# EAGLE board hpwr_LO_psupp (EAGLE 6.6.0)
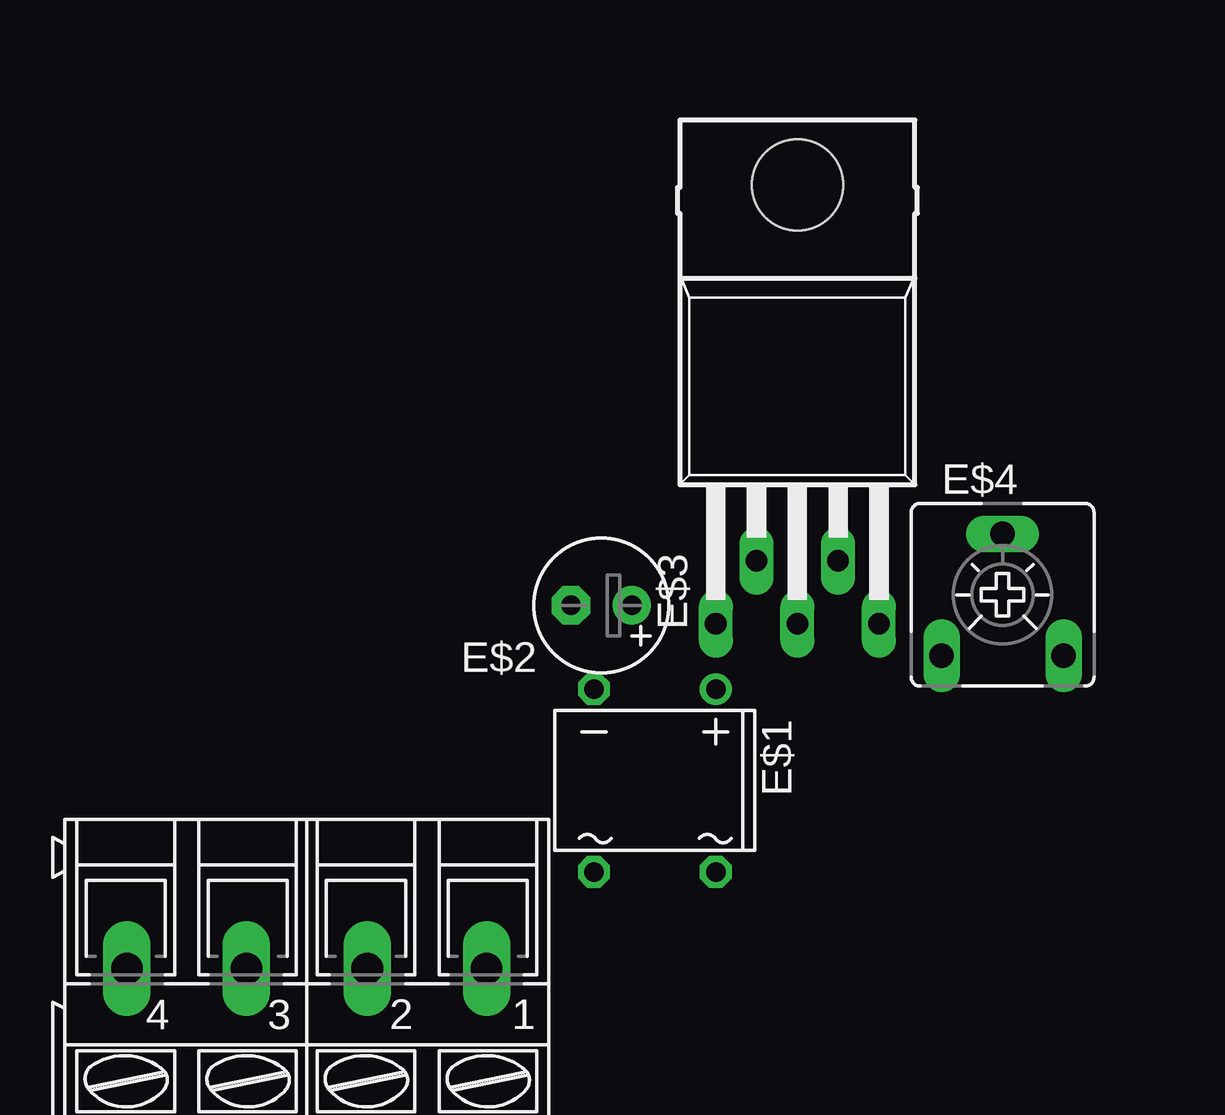
[diagram p0: board, top side]
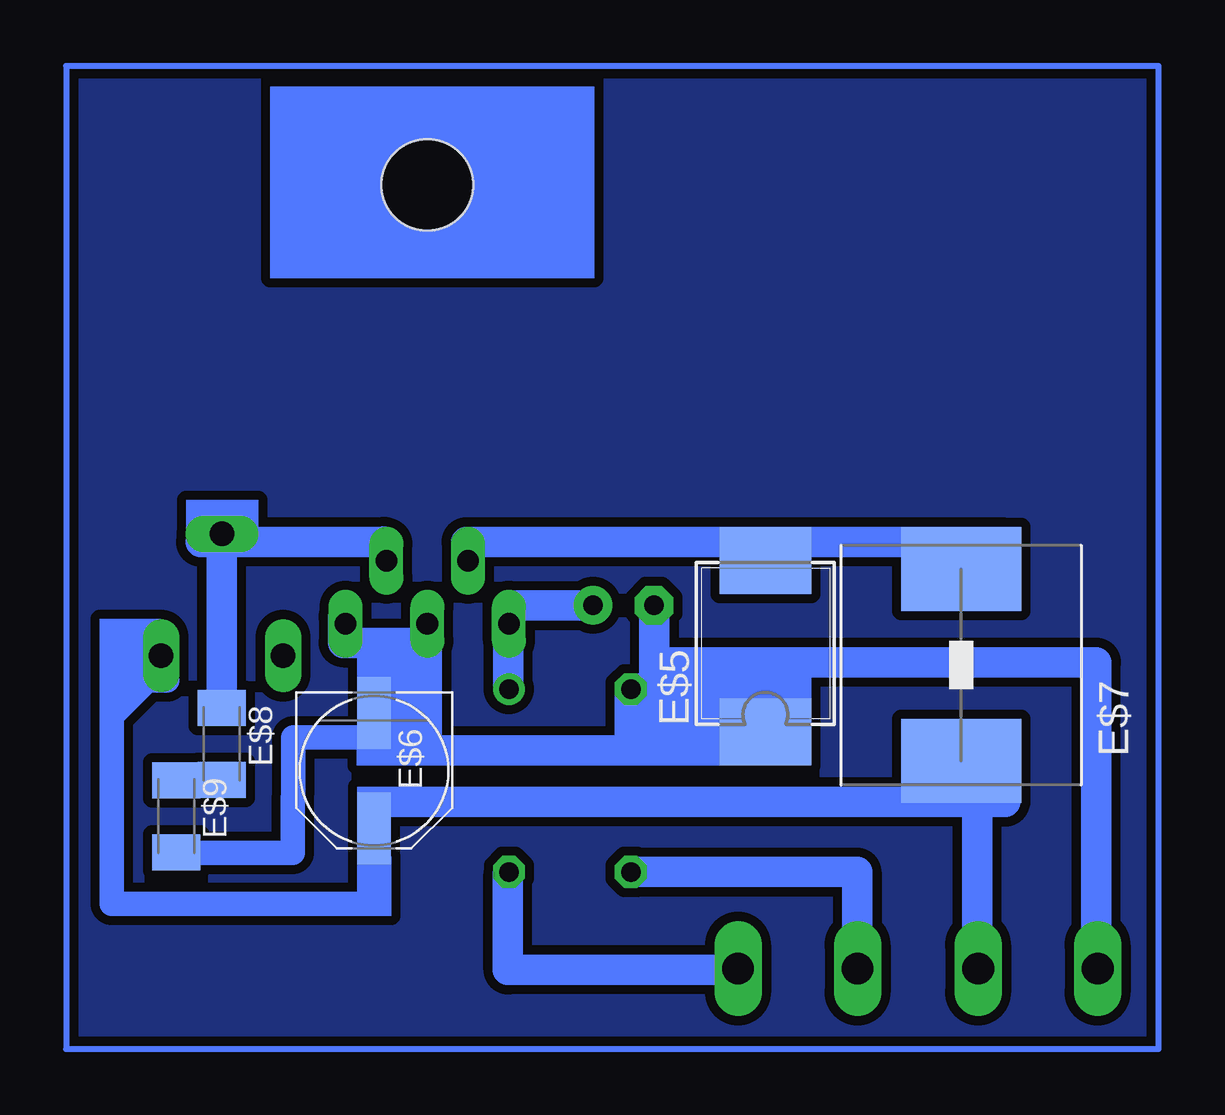
[diagram p1: board, bottom side, seen from below]

No outline drawn. Coordinates in mm, seen from the top.
Copper layers (1*16): Top 0.035mm / dielectric 1.5mm / Bottom 0.035mm
Design rules "default *": minimum track width 10mil, minimum drill 24mil, track to track 15mil, track to pad 15mil, pad to pad 15mil, via to via 15mil, smd to smd 15mil, copper to edge 40mil, drill to drill 8mil, minimum pad ring 10mil, minimum via ring 8mil, stop-mask expansion 4mil, vias tented up to drill 0mil, thermal gap 10mil

## Footprints (pad centres in the part's own frame; a part is rotated, then mirrored left to right if it is on the bottom)
DB = drill 0.813: + -2.54,-3.81 | drill 0.813 octagon: - 2.54,-3.81; AC1 2.54,3.81; AC2 -2.54,3.81
E2,5-6 = drill 0.813 pad 1.6: + -1.27,0 | drill 0.813 pad 1.6 octagon: - 1.27,0
TO220-52 = drill 0.9 long: 1 -3.4,-21.1; 2 -1.7,-18.47; 3 0,-21.1; 4 1.7,-18.47; 5 3.4,-21.1 | hole 3.8: 0,-2.8
CA6V = drill 1.016 long: A -2.54,-2.54; E 2.54,-2.54; S 0,2.54
SMC = smd 2.794 x 3.81: 1 -3.81,-0.127; 2 3.327,-0.127
PANASONIC_D = smd 3 x 1.4: + 2.4,0; - -2.4,0
WE-HC_74432... = smd 3.5 x 5: 1 -4,0; 2 4,0
C1206K = smd 1.5 x 2: 1 -1.5,0; 2 1.5,0
AK300/4 = drill 1.321 long: 1 -7.493,0; 2 -2.515,0; 3 2.515,0; 4 7.493,0

## Placement (x,y rotation side)
E$1  [DB]  24.53,11.19 180 top
E$2  [E2,5-6]  22.3,18.49 180 top
E$3  [TO220-52]  30.47,38.82 0 top
E$4  [CA6V]  39.02,18.93 0 top
E$5  [SMC]  16.51,17.03 90 bottom
E$6  [PANASONIC_D]  32.69,11.6 270 bottom
E$7  [WE-HC_74432...]  8.23,16 90 bottom
E$8  [C1206K]  39.03,12.71 270 bottom
E$9  [C1206K]  40.94,9.7 270 bottom
E$10  [AK300/4]  10.03,3.35 180 top

## Library data of the parts
E$1 = rectifier
E$2 E$6 E$8 E$9 = rcl
E$3 = ref-packages
E$4 = pot
E$5 = ref-packages-longpad
E$7 = wuerth-elektronik
E$10 = con-ptr500

## Tracks (layer width: path | path; a pad name or v marks a point on that pad's centre or on a via)
S$1
  Bottom 1.27: 27.09,15 27.09,18.49 23.4,18.49
S$2
  Bottom 1.27: 21.02,18.49 21.02,15.02 22.01,15.02
S$3
  Bottom 1.27: 6.37,21.12 28.85,21.14
S$4
  Bottom 1.27: 21.02,15.3 21.02,13.99 17.09,13.99
S$5
  Bottom 1.27: 30.5,17.76 30.5,16.93 | 30.5,16.93 30.5,12.45 17.62,12.45 | 33.98,18.01 33.98,16.93 30.5,16.93
S$6
  Bottom 1.27: 6.38,10.29 32.76,10.3
S$7
  Bottom 1.27: 32.28,21.16 32.28,21.13 39.04,21.13 | 39.04,21.13 39.91,21.13 | 39.01,14.12 39.04,14.12 39.04,21.13
S$8
  Bottom 1.016: 41.04,8.17 36.08,8.17 36.06,12.98 32.44,12.98 32.46,12.58
S$9
  Bottom 1.016: 41.56,16.37 43.62,16.37 43.62,13.87 | 43.62,13.87 43.62,6.05 32.89,6.05 32.89,9.02 | 43.62,13.87 42.13,15.36 41.3,15.36
S$10
  Bottom 1.27: 21.98,7.38 12.56,7.38 12.56,3.31
S$11
  Bottom 1.27: 17.52,3.29 27.11,3.29 27.11,7.3
S$12
  Bottom 1.27: 7.56,3.29 7.56,10.94
S$13
  Bottom 1.27: 2.59,3.29 2.59,16.11 20.64,16.11
S$14
  Bottom 0.254: 0,0 0,40.97 45.52,40.97 45.52,0 0,0
S$15
  pour Bottom: 0,0.04 0,40.95 45.51,40.95 45.51,0.04
(copper drawn outside any net)
  shapes: Bottom area x12